# Altium PCB PCB_mic_array.pcbdoc
Units mil, origin at the board's own origin, x right, y up, seen from the top; angles counter-clockwise.
Board outline 10485.75 x 9420.34 mil, 2 copper layers (Top Layer, Bottom Layer); 66 components, 56 nets, 207 pads, 92 vias.
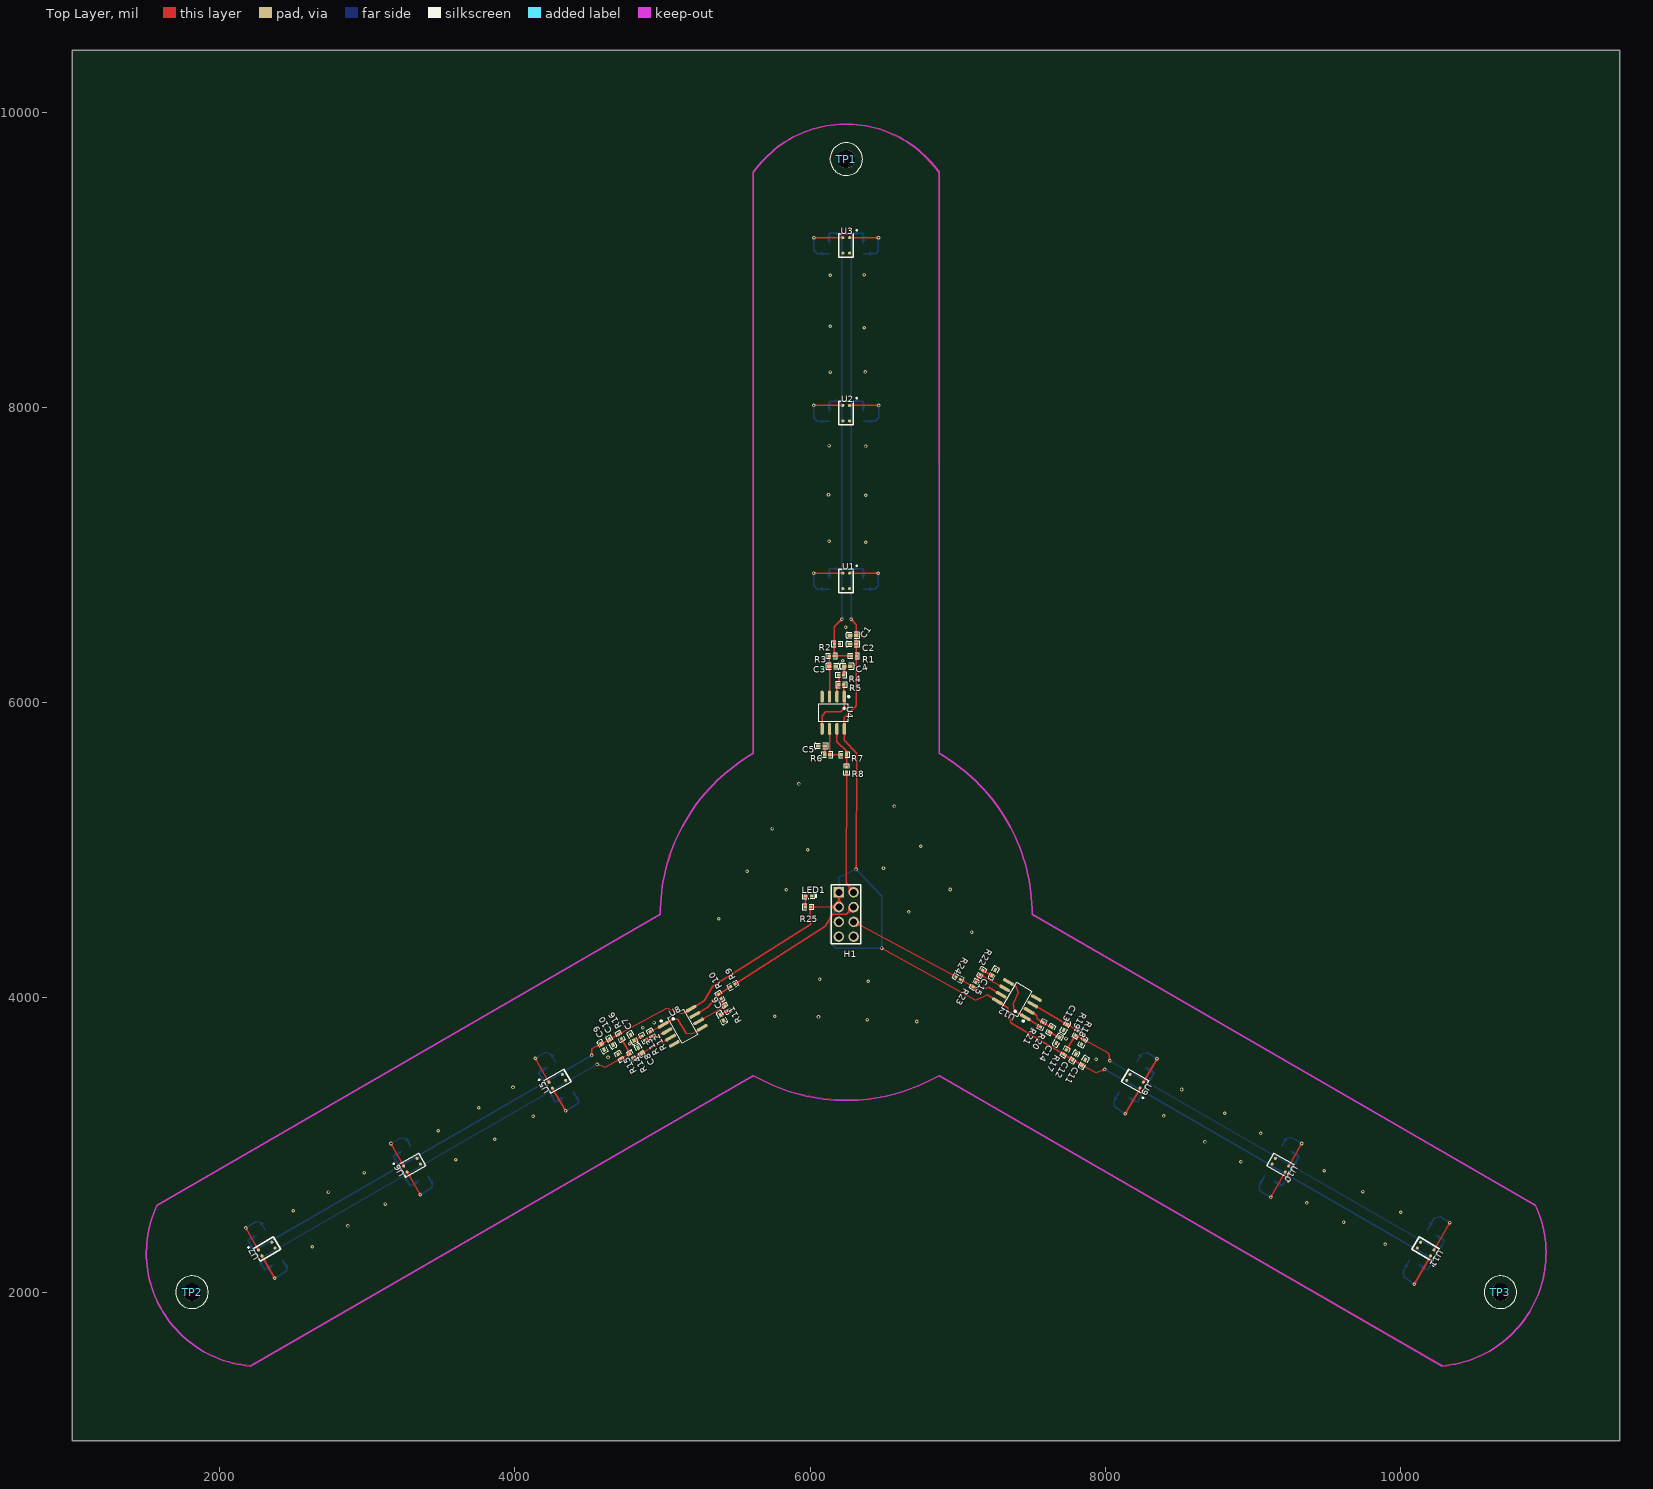
[diagram p0: Top Layer view]
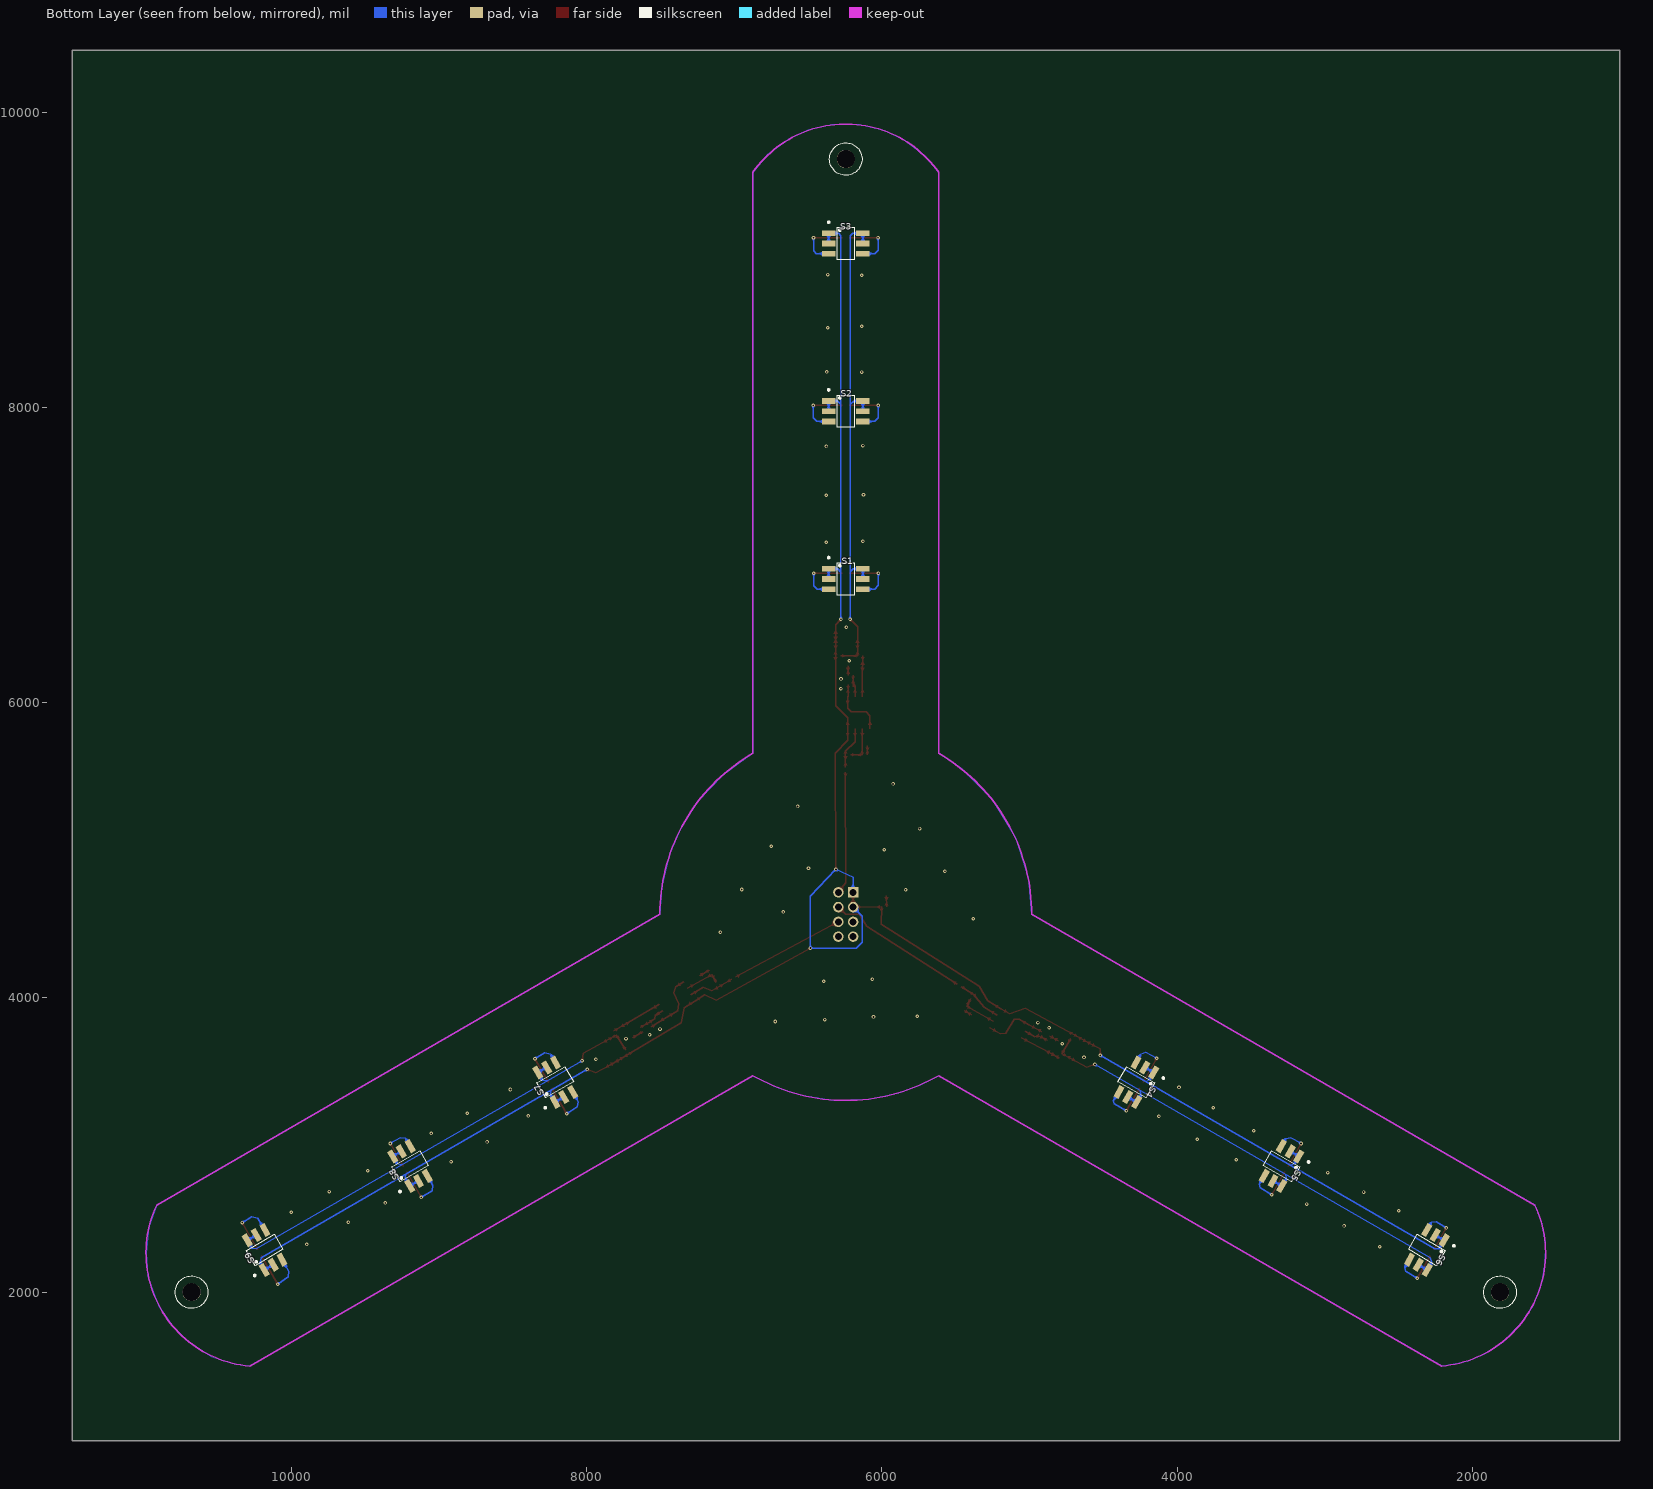
[diagram p1: Bottom Layer view, seen from below]

## Layer stack, top to bottom
Top Layer: signal copper (thickness not stored)
Dielectric: dielectric 12.6, FR-4, Dk 4.8
Bottom Layer: signal copper (thickness not stored)

## Board outline
11485.75,1000 1000,1000 1000,10420.34 11485.75,10420.34

## Components (designator, comment, footprint, x,y, rotation, side; value= is the part's Value field where it differs from the comment)
C1 "0.1u" C0402 6291.29,6456.37 r0 top
C2 "0.1u" C0402 6291.29,6396.37 r0 top
C3 "1u" C0402 6151.29,6246.37 r180 top
C4 "0.1u" C0402 6251.29,6246.37 r0 top
C5 "0.1u" C0402 6076.29,5706.37 r0 top
C6 "0.1u" C0402 5402.35,3864.84 r120 top
C7 "0.1u" C0402 4795.27,3729.01 r120 top
C8 "1u" C0402 4846.06,3643.18 r300 top
C9 "0.1u" C0402 4593.3,3667.59 r120 top
C10 "0.1u" C0402 4652.75,3699.48 r120 top
C11 "0.1u" C0402 7853.14,3562.48 r240 top
C12 "0.1u" C0402 7789.36,3599.09 r240 top
C13 "1u" C0402 7728.73,3800.66 r60 top
C14 "0.1u" C0402 7677.94,3712.08 r240 top
C15 "0.1u" C0402 7242.9,4169.56 r240 top
H1 "A2541WV-2X4P" HDR-TH_8P-P2.54-V-R2-C4-S2.54_A2541WV-2X4P 6244.48,4564.44 r270 top
LED1 "16-219A/T2D-AR2T1QY/3T" LED0402-RD 5989.76,4690.82 r180 top
R1 "1M" R0402 6296.29,6316.37 r0 top
R2 "1M" R0402 6181.29,6396.37 r180 top
R3 "0" R0402 6146.29,6316.37 r0 top
R4 "10k" R0402 6211.29,6186.37 r0 top
R5 "120k" R0402 6211.29,6121.37 r180 top
R6 "10k" R0402 6116.29,5646.37 r0 top
R7 "120k" R0402 6229.36,5646.76 r180 top
R8 "100k" R0402 6246.29,5546.37 r90 top
R9 "100k" R0402 5475.58,4084.13 r210 top
R10 "120k" R0402 5388.18,4009.33 r300 top
R11 "10k" R0402 5433.85,3928.22 r120 top
R12 "120k" R0402 4924.01,3755.78 r300 top
R13 "10k" R0402 4870.07,3725.86 r120 top
R14 "0" R0402 4788.18,3606.57 r120 top
R15 "1M" R0402 4708.26,3602.63 r300 top
R16 "1M" R0402 4712.59,3738.46 r120 top
R17 "1M" R0402 7727.15,3631.77 r240 top
R18 "1M" R0402 7847.23,3700.27 r60 top
R19 "0" R0402 7806.68,3761.3 r240 top
R20 "10k" R0402 7628.73,3784.92 r240 top
R21 "120k" R0402 7570.07,3817.59 r60 top
R22 "10k" R0402 7160.23,4172.32 r240 top
R23 "120k" R0402 7112.59,4089.25 r60 top
R24 "100k" R0402 7003.53,4132.55 r330 top
R25 "1k" R0402 5984.64,4615.23 r180 top
S1 "CAS-D20TB" CAS-D20TB 6244.48,6837.47 r90 bottom
S2 "CAS-D20TB" CAS-D20TB 6244.48,7974 r90 bottom
S3 "CAS-D20TB" CAS-D20TB 6244.48,9110.5 r90 bottom
S4 "CAS-D20TB" CAS-D20TB 4275.98,3427.91 r210 bottom
S5 "CAS-D20TB" CAS-D20TB 3291.73,2859.68 r210 bottom
S6 "CAS-D20TB" CAS-D20TB 2307.48,2291.42 r210 bottom
S7 "CAS-D20TB" CAS-D20TB 8212.98,3427.91 r330 bottom
S8 "CAS-D20TB" CAS-D20TB 9197.23,2859.68 r330 bottom
S9 "CAS-D20TB" CAS-D20TB 10181.48,2291.42 r330 bottom
TP1 "M3X6+4 铜柱" M3铜柱 6244.48,9682.54 r0 top
TP2 "M3X6+4 铜柱" M3铜柱 1812.09,2005.39 r0 top
TP3 "M3X6+4 铜柱" M3铜柱 10676.87,2005.39 r0 top
U1 "spq1410hr5h-b" SPQ1410HR5H-B 6244.48,6824.48 r0 top
U2 "spq1410hr5h-b" SPQ1410HR5H-B 6244.48,7961.05 r0 top
U3 "spq1410hr5h-b" SPQ1410HR5H-B 6244.48,9097.54 r0 top
U4 "MCP6022-I/SN" SOIC-8_L4.9-W3.9-P1.27-LS6.0-BL 6156.28,5931.34 r180 top
U5 "spq1410hr5h-b" SPQ1410HR5H-B 4287.24,3434.41 r120 top
U6 "spq1410hr5h-b" SPQ1410HR5H-B 3302.99,2866.18 r120 top
U7 "spq1410hr5h-b" SPQ1410HR5H-B 2318.74,2297.91 r120 top
U8 "MCP6022-I/SN" SOIC-8_L4.9-W3.9-P1.27-LS6.0-BL 5136.98,3806.94 r300 top
U9 "spq1410hr5h-b" SPQ1410HR5H-B 8201.68,3434.45 r240 top
U10 "spq1410hr5h-b" SPQ1410HR5H-B 9185.97,2866.14 r240 top
U11 "spq1410hr5h-b" SPQ1410HR5H-B 10170.18,2297.95 r240 top
U12 "MCP6022-I/SN" SOIC-8_L4.9-W3.9-P1.27-LS6.0-BL 7400.78,3987.64 r60 top

## Footprints (in the part's own frame and the unit in brackets; to place one, negate y for a bottom-side part, rotate by r counter-clockwise, add the part's x,y. Pads: shape width x height; smd on the part's side, far side on the other; paste and mask are expansions set on the pad)
C0402 [mm]
  rect 0.79x0.54 smd: 1(-0.545,0) 2(0.545,0)
  silkscreen extent -1.17,-0.5 1.17,0.5
CAS-D20TB [mm]
  rect 0.98x2.28 smd: 1(1.75,2.94) 2(0,2.94) 3(-1.75,2.94) 4(1.75,-2.94) 5(0,-2.94) 6(-1.75,-2.94)
  silkscreen extent -2.78,-1.5 3.84,3.1
HDR-TH_8P-P2.54-V-R2-C4-S2.54_A2541WV-2X4P [mm]
  rect 1.8x1.8 hole 1.2: 1(-3.81,-1.27)
  round 1.8 hole 1.2: 2(-3.81,1.27) 3(-1.27,-1.27) 4(-1.27,1.27) 5(1.27,-1.27) 6(1.27,1.27) 7(3.81,-1.27) 8(3.81,1.27)
  silkscreen extent -5.08,-2.54 5.08,2.54
LED0402-RD [mm]
  rect 0.636x0.54 smd: 1(-0.538,0) 2(0.538,0)
  silkscreen extent -1.39,-0.54 1.09,0.54
M3铜柱 [mm]
  round 3.1 hole 3.1 unplated: ""(0,0)
  Top Layer pour cut-out: -0.009,-2.933 1.452,-2.541 2.522,-1.471 2.913,-0.009 2.521,1.452 1.451,2.521 -0.01,2.913 -1.471,2.521 -2.541,1.452 -2.933,-0.009 -2.542,-1.471 -1.472,-2.541 -0.011,-2.933 -0.011,-2.933 -0.011,-2.933 -0.009,-2.933
  Bottom Layer pour cut-out: -0.009,-2.913 1.452,-2.521 2.522,-1.451 2.913,0.011 2.521,1.472 1.451,2.541 -0.01,2.933 -1.471,2.541 -2.541,1.472 -2.933,0.011 -2.542,-1.451 -1.472,-2.521 -0.011,-2.913 -0.011,-2.913 -0.011,-2.913 -0.009,-2.913
  silkscreen extent -2.8,-2.8 2.8,2.8
R0402 [mm]
  rect 0.566x0.54 smd: 1(-0.433,0) 2(0.433,0)
  silkscreen extent -0.94,-0.5 0.94,0.5
SOIC-8_L4.9-W3.9-P1.27-LS6.0-BL [mm]
  oval 0.588x2.045 smd: 1(-1.905,-2.773) 2(-0.635,-2.773) 3(0.635,-2.773) 4(1.905,-2.773) 5(1.905,2.773) 6(0.635,2.773) 7(-0.635,2.773) 8(-1.905,2.773)
  silkscreen extent -2.8,-2.92 2.53,1.52
SPQ1410HR5H-B [mm]
  round 0.525 smd: 1(0.575,1.33) 2(0.575,-1.33) 3(-0.575,-1.33) 4(-0.575,1.33)
  silkscreen extent -1.25,-2.01 1.9,2.7

## Via types
v1: diameter 24, hole 12, Top Layer to Bottom Layer, tented both sides, 92 vias

## Nets (pads, with @x,y where several pads share a name; then routed paths per layer and width w, separated by ;. In a path a pad name is that pad's centre, name@x,y a point inside that pad or via, vN(x,y) a via of type N, cw(c..) or ccw(c..) an arc to the next point about the centre after c; other vN are vias at no path point)
C6_2: C6.2 R11.1 | length 59
  Top Layer w10: C6.2 R11.1@5442.38,3913.44
C7_1: C7.1 R13.2 | length 63.3
  Top Layer w10: C7.1 R13.2
C8_2: C8.2 R14.1 U8.3 | length 293.3
  Top Layer w10: R14.1 C8.2 U8.3@5054.98,3730.74
GND: C1.1 C2.1 C3.1 C4.2 C5.1 C6.1 C7.2 C8.1 C9.1 C10.1 C11.1 C12.1 C13.1 C14.2 C15.1 H1.5 H1.7 H1.8 LED1.1 R2.1 R15.1 R18.1 U1.2 U1.3 U2.2 U2.3 U3.2 U3.3 U4.4 U5.2 U5.3 U6.2 U6.3 U7.2 U7.3 U8.4 U9.2 U9.3 U10.2 U10.3 U11.2 U11.3 U12.4
  other v1: 2626.77,2313.26 9896.05,2329.01 2868.11,2454.6 9614.16,2479.01 10001.17,2547.12 2497.24,2557.75 3121.65,2602.24 9364.55,2610.51 2735.83,2683.34 9743.29,2686.88 2978.74,2815.62 9482.66,2828.62 8918.88,2888.85 3599.6,2902.63 8674.4,3023.1 3862.6,3042 9053.53,3080.98 3480.71,3099.88 4122.83,3197.51 8395.26,3199.48 8808.25,3217.99 3754.72,3254.99 8516.52,3378.62 3986.61,3392.39 7937.39,3582.95 4630.31,3595.94 4778.34,3688.06 7733.45,3723.5 7573.61,3749.87 7503.14,3787.67 4867.32,3797.51 4942.91,3831.76 6722.04,3839.24 6386.21,3852.24 6056.69,3870.74 5760.23,3874.28 6393.69,4111.68 6063.77,4126.25 7093.69,4444.75 5380.31,4534.91 6667.71,4581.76 5838.97,4731.76 6948.81,4733.73 5572.43,4856.56 6496.84,4878.22 5983.06,5002.63 6749.2,5026.25 5744.48,5146.72 6571.25,5296.72 5923.62,5449.08 6277.16,6093.57 6276.76,6160.11 6220.86,6284.12 6239.76,6510.5 6376.37,7086.09 6127.95,7093.57 6376.37,7404.59 6124.4,7408.53 6375.58,7735.3 6127.95,7741.6 6136.61,8239.63 6374.01,8240.02 6366.53,8539.63 6136.61,8549.86 6136.61,8894.75 6366.53,8899.86
OUT1: H1.2 R8.1 | length 832.2
  Top Layer w10: R8.1 6244.48,4778.24 H1.2
OUT2: H1.4 R9.1 | length 981.9
  Top Layer w10: R9.1@5490.38,4092.64 6100.78,4485.74 6154.68,4564.44 6244.48,4564.44 H1.4
OUT3: H1.6 R24.1 | length 788.3
  Top Layer w10: H1.6 R24.1@6988.78,4141.04
R4_2: C4.1 R4.2 | length 60.6
  Top Layer w10: R4.2@6228.38,6186.34 6228.38,6244.84 C4.1@6229.78,6246.34
R6_1: C5.2 R6.1 | length 60.6
  Top Layer w10: C5.2@6097.78,5706.34 6097.78,5647.84 R6.1@6099.28,5646.34
R9_2: R9.2 R10.1 U8.7 | length 313.2
  Top Layer w10: U8.7@5218.98,3883.14 5307.48,3935.34 5379.68,4024.04 R9.2
R10_2: R10.2 R11.2 U8.6 | length 267.7
  Top Layer w10: U8.6@5243.98,3839.84 5425.38,3942.94 R10.2@5396.68,3994.54
R12_1: R12.1 U8.1 U8.5 | length 437.6
  Top Layer w10: R12.1 5004.98,3817.34 5069.68,3854.64 5102.78,3853.84 5160.58,3760.54 5197.68,3756.54 U8.5@5268.98,3796.54
R12_2: R12.2 R13.1 U8.2 | length 168.6
  Top Layer w10: R13.1 R12.2 4963.38,3737.64 U8.2@5029.98,3774.04
R20_2: C14.1 R20.2 | length 79.1
  Top Layer w10: R20.2@7620.18,3770.14 C14.1@7688.68,3730.64
R22_1: C15.2 R22.1 | length 73
  Top Layer w10: R22.1@7168.78,4187.04 C15.2@7232.18,4150.94
R25_2: LED1.2 R25.2 | length 75.6
  Top Layer w10: R25.2 LED1.2
S$35682: 
S$35696: 
S$35736: 
S$35740: 
S$35744: 
S$35748: 
S$35752: 
S$35756: 
SIGN1: R1.1 R2.2 R3.2 S1.4 S1.5 S2.4 S2.5 S3.4 S3.5 | length 3471.1
  Top Layer w10: v1@6215.38,6564.04 6164.28,6512.94 6164.28,6396.34 6163.38,6316.34 R1.1@6279.28,6316.34
  Bottom Layer w10: S1.5@6128.78,6837.44 6128.78,6906.34 6193.58,6906.34 6214.98,6884.94 ; S2.5@6128.78,7974.04 6128.78,8042.94 6191.78,8042.94 6213.78,8020.94 ; S3.5@6128.78,9110.54 6128.78,9179.44 6197.58,9179.44 6212.58,9164.44 6212.58,9086.44 v1@6215.38,6564.04
  other v1: 6215.35,6564.04
SIGN1_RECV1: S1.6 U1.4 | length 397.9
  Top Layer w10: v1(6022.83,6876.64) U1.4@6221.88,6876.84
  Bottom Layer w10: v1(6022.83,6876.64) 6022.78,6794.74 6048.98,6768.54 S1.6@6128.78,6768.54
SIGN1_RECV2: S2.6 U2.4 | length 396.1
  Top Layer w10: v1@6023.98,8013.24 U2.4@6221.88,8013.44
  Bottom Layer w10: v1@6023.98,8013.24 6023.98,7930.14 6049.08,7905.14 S2.6@6128.78,7905.14
  other v1: 6024.01,8013.25
SIGN1_RECV3: S3.6 U3.4 | length 393.9
  Top Layer w10: v1@6025.58,9149.44 U3.4@6221.88,9149.94
  Bottom Layer w10: v1@6025.58,9149.44 6025.58,9064.44 6048.38,9041.64 S3.6@6128.78,9041.64
  other v1: 6025.58,9149.47
SIGN1_VCC1: S1.3 U1.1 | length 389.4
  Top Layer w10: U1.1 v1(6461.41,6876.64)
  Bottom Layer w10: S1.3@6360.18,6768.54 6437.18,6768.54 6461.38,6792.74 v1(6461.41,6876.64)
SIGN1_VCC2: S2.3 U2.1 | length 395.9
  Top Layer w10: U2.1 v1@6464.98,8013.24
  Bottom Layer w10: S2.3 6439.48,7905.14 6464.98,7930.54 v1@6464.98,8013.24
  other v1: 6464.95,8013.25
SIGN1_VCC3: S3.3 U3.1 | length 395.8
  Top Layer w10: U3.1 v1@6462.98,9149.84
  Bottom Layer w10: S3.3 6444.08,9041.64 6462.98,9060.54 v1@6462.98,9149.84
  other v1: 6462.98,9149.86
SIGN2: R14.2 R15.2 R16.1 S4.4 S4.5 S5.4 S5.5 S6.4 S6.5 | length 3463.2
  Top Layer w10: v1(4556.3,3548.3) 4611.38,3529.84 4716.78,3587.84 R14.2 R16.1
  Bottom Layer w10: S6.5@2365.38,2191.14 S6.4 2275.18,2209.74 2285.48,2238.84 v1(4556.3,3548.3) ; 3264.08,2803.14 3258.68,2776.64 3289.98,2724.94 S5.5 ; 4250.78,3372.24 4244.48,3341.64 S4.4 S4.5@4333.88,3327.64
SIGN2_RECV1: S4.6 U5.4 | length 366.5
  Top Layer w10: U5.4 v1(4342.91,3234.13)
  Bottom Layer w10: v1(4342.91,3234.13) 4425.58,3281.74 4431.88,3301.04 S4.6
SIGN2_RECV2: S5.6 U6.4 | length 362.9
  Top Layer w10: U6.4 v1(3358.66,2665.23)
  Bottom Layer w10: v1(3358.66,2665.23) 3436.98,2712.04 3444.08,2735.34 S5.6@3409.28,2793.84
SIGN2_RECV3: S6.6 U7.4 | length 354.5
  Top Layer w10: U7.4 v1(2372.44,2100.27)
  Bottom Layer w10: v1@2372.48,2100.24 2450.38,2148.34 2457.88,2170.34 S6.6
SIGN2_VCC1: S4.3 U5.1 | length 372
  Top Layer w10: v1(4137.79,3589.64) U5.1
  Bottom Layer w10: v1(4137.79,3589.64) 4212.98,3631.74 4246.48,3616.84 S4.3
SIGN2_VCC2: S5.3 U6.1 | length 351.8
  Top Layer w10: v1@3159.48,3012.84 U6.1
  Bottom Layer w10: v1@3159.48,3012.84 3228.38,3053.04 3264.98,3045.54 S5.3@3293.48,2994.34
  other v1: 3159.45,3012.87
SIGN2_VCC3: S6.3 U7.1 | length 348.1
  Top Layer w10: v1(2175.59,2440.82) U7.1
  Bottom Layer w10: v1(2175.59,2440.82) 2244.08,2482.14 2278.38,2478.64 S6.3
SIGN3: R17.1 R18.2 R19.2 S7.4 S7.5 S8.4 S8.5 S9.4 S9.5 | length 3461.3
  Top Layer w10: R17.1 R19.2 R18.2 8023.98,3625.04 v1(8031.09,3573.5)
  Bottom Layer w10: v1(8031.09,3573.5) 10239.98,2299.14 10268.08,2303.44 S9.4 S9.5@10239.38,2391.64 ; 8266.48,3437.44 8299.58,3440.44 S7.4 S7.5@8270.88,3528.14 ; 9251.08,2869.64 9283.88,2874.24 9314.78,2925.44 S8.5
SIGN3_RECV1: S7.6 U9.4 | length 367.3
  Top Layer w10: U9.4 v1(8349.99,3587.28)
  Bottom Layer w10: S7.6 8244.48,3619.14 8285.38,3627.44 v1@8349.98,3587.24
SIGN3_RECV2: S8.6 U10.4 | length 354.1
  Top Layer w10: U10.4 v1(9331.09,3012.87)
  Bottom Layer w10: S8.6@9195.48,2994.34 9226.78,3049.04 9264.58,3050.24 v1@9331.08,3012.84
SIGN3_RECV3: S9.6 U11.4 | length 425.8
  Top Layer w10: U11.4 v1(10333.45,2477.04)
  Bottom Layer w10: S9.6 10227.58,2506.54 10268.48,2516.44 v1@10333.48,2477.04
SIGN3_VCC1: S7.3 U9.1 | length 399.7
  Top Layer w10: v1(8135.42,3214.84) U9.1
  Bottom Layer w10: S7.3@8095.48,3362.14 8055.88,3295.14 8062.58,3260.54 v1(8135.42,3214.84)
SIGN3_VCC2: S8.3 U10.1 | length 396.6
  Top Layer w10: v1(9120.46,2647.51) U10.1
  Bottom Layer w10: S8.3@9079.68,2793.84 9042.48,2730.94 9046.88,2694.34 v1(9120.46,2647.51)
SIGN3_VCC3: S9.3 U11.1 | length 440.3
  Top Layer w10: v1(10093.29,2059.33) U11.1
  Bottom Layer w10: S9.3@10063.98,2225.64 10017.28,2146.74 10020.08,2109.34 v1(10093.29,2059.33)
U4_1: R5.1 U4.1 U4.5 | length 421
  Top Layer w10: U4.5 6081.28,5911.34 6106.28,5936.34 6206.28,5936.34 6231.28,5961.34 U4.1 6228.38,6043.44 R5.1@6228.38,6121.34
U4_2: R4.1 R5.2 U4.2 | length 151.2
  Top Layer w10: U4.2 6181.28,6108.44 6194.28,6121.34 R4.1@6194.28,6186.34
U4_3: C3.2 R3.1 U4.3 | length 276.5
  Top Layer w10: R3.1@6129.28,6316.34 6129.78,6246.34 6131.28,6244.94 U4.3
U4_6: R6.2 R7.2 U4.6 | length 255.7
  Top Layer w10: U4.6 6133.38,5820.14 6133.38,5646.34 R7.2@6212.28,5646.74
U4_7: R7.1 R8.2 U4.7 | length 285.8
  Top Layer w10: U4.7 6181.28,5736.14 6246.38,5671.04 6246.38,5646.74 R8.2
U12_1: R21.1 U12.1 U12.5 | length 443.7
  Top Layer w10: U12.5@7343.78,4107.14 7396.48,4075.04 7409.48,4033.34 7375.18,3960.54 7383.88,3912.04 U12.1 R21.1@7561.58,3802.84
U12_2: R20.1 R21.2 U12.2 | length 197.9
  Top Layer w10: U12.2 7534.98,3880.14 7538.98,3857.74 7578.58,3832.34 R20.1@7637.28,3799.64
U12_3: C13.2 R19.1 U12.3 | length 355.6
  Top Layer w10: U12.3 C13.2 R19.1@7815.18,3776.04
U12_6: R22.2 R23.2 U12.6 | length 253.2
  Top Layer w10: R23.2 7151.68,4157.54 U12.6@7318.78,4063.84
U12_7: R23.1 R24.2 U12.7 | length 314.5
  Top Layer w10: R24.2 7104.08,4074.44 7152.38,4046.34 7209.48,4069.94 U12.7@7293.78,4020.54
VCC: C1.2 C2.2 C9.2 C10.2 C11.2 C12.2 H1.1 H1.3 R1.2 R16.2 R17.2 R25.1 S1.1 S1.2 S2.1 S2.2 S3.1 S3.2 S4.1 S4.2 S5.1 S5.2 S6.1 S6.2 S7.1 S7.2 S8.1 S8.2 S9.1 S9.2 U4.8 U8.8 U12.8 | length 16466.5
  Top Layer w10: v1(4519.68,3609.72) 4520.48,3653.44 4582.58,3686.14 4641.98,3718.04 R16.2 5026.78,3927.44 5134.28,3893.54 5193.98,3926.44 5283.08,3979.04 5340.58,4079.04 6002.78,4498.34 R25.1 H1.3 H1.1 ; v1(6277.16,6564.44) 6312.78,6528.84 6312.78,6456.34 6312.78,6396.34 6313.38,6316.34 6313.38,5978.44 6231.28,5896.34 U4.8 6231.88,5743.54 6314.98,5656.14 v1@6311.38,4869.94 ; v1@6483.88,4336.44 7122.78,3984.54 7200.38,4019.54 U12.8@7268.78,3977.34 ; U12.8@7268.78,3977.24 7338.58,3934.14 7360.18,3829.84 7718.68,3617.04 7778.68,3580.54 C11.2 7938.18,3492.04 v1(7996.48,3514.44)
  Bottom Layer w10: S6.2@2249.58,2391.64 2189.98,2357.24 2224.38,2298.74 2253.58,2299.84 v1(4519.68,3609.72) ; 3232.18,2865.54 3206.28,2873.94 3174.18,2925.44 S5.2 ; 4212.08,3431.94 4187.38,3443.94 4158.48,3493.74 S4.2@4218.08,3528.14 ; H1.3 6133.48,4553.44 6133.48,4376.24 6173.58,4336.14 6483.88,4336.44 6483.88,4689.64 6311.38,4869.94 6194.88,4817.54 H1.1 ; v1(6277.16,6564.44) 6277.18,9164.04 6292.48,9179.44 S3.1 S3.2 ; 6277.18,6884.44 6299.08,6906.34 6360.18,6906.34 S1.2@6360.18,6837.44 ; 6277.18,8021.64 6298.48,8042.94 S2.1 S2.2 ; v1(7996.48,3514.44) 10205.88,2237.64 10212.58,2208.14 S9.1 S9.2@10123.58,2191.14 ; S7.2@8155.08,3327.64 S7.1 8246.08,3348.74 8241.48,3372.44 ; S8.2 9198.98,2724.94 9230.28,2779.04 9224.58,2804.44
  other v1: 6483.85,4336.49 6311.41,4869.95
pads on no net: TP1. TP2. TP3.

## Polygon pours and split planes (outlines as drawn)
GND on Bottom Layer (solid): 10282.66,1505.39 6875.97,3471.93 6711.41,3393.18 6551.17,3342.4 6327.16,3305.39 6095.27,3312.48 5896.45,3352.24 5737.39,3412.48 5613.77,3472.32 2204.33,1505.79 2033.86,1538.86 1915.75,1587.68 1794.88,1665.63 1666.93,1794.76 1584.65,1918.78 1529.92,2062.87 1503.94,2205.79 1501.97,2328.62 1526.77,2467.99 1574.41,2594.76 4983.46,4564.05 5006.29,4810.51 5088.97,5076.65 5251.96,5345.15 5463.38,5554.2 5613.77,5656.96 5614.16,9592.78 5705.5,9702.62 5839.76,9805.38 5983.85,9875.85 6151.96,9915.22 6338.18,9915.22 6501.17,9876.64 6631.09,9817.58 6774.79,9710.1 6873.61,9591.2 6874.4,5656.57 7079.52,5508.93 7248.41,5331.37 7359.44,5154.99 7436.6,4980.19 7489.75,4753.81 7505.11,4564.44 10913.37,2595.16 10968.09,2443.97 10985.41,2269.17 10972.03,2110.51 10902.74,1917.2 10805.49,1773.11 10705.49,1675.87 10588.17,1597.13 10538.57,1569.17 10375.97,1517.2 10282.66,1505.39
GND on Top Layer (solid): 5613.38,9590.42 5690.94,9686.09 5784.64,9766.01 5888.18,9832.54 6009.05,9882.54 6123.22,9911.68 6257.47,9920.34 6396.05,9903.8 6493.3,9878.21 6635.42,9814.04 6747.63,9732.54 6872.43,9593.96 6874.01,5657.35 7043.3,5540.43 7187,5401.45 7321.25,5221.92 7398.41,5070.74 7454.32,4922.71 7488.57,4774.68 7504.32,4563.26 10912.97,2596.73 10958.25,2475.86 10985.02,2336.89 10985.02,2224.68 10969.27,2102.64 10929.11,1979.8 10870.06,1862.87 10788.96,1756.58 10692.11,1665.63 10603.92,1605.79 10492.9,1553.82 10406.28,1526.65 10285.02,1505.79 6875.58,3472.32 6746.05,3408.15 6576.37,3347.91 6457.47,3322.71 6356.29,3308.15 6203.53,3305.78 6051.17,3321.14 5856.69,3364.05 5742.12,3408.15 5612.98,3472.32 2205.12,1505.39 2037.01,1536.5 1888.98,1602.24 1766.54,1690.04 1661.42,1799.88 1577.17,1934.13 1523.62,2086.49 1500,2262.87 1520.87,2445.55 1572.84,2595.55 4983.85,4565.23 4997.24,4757.36 5043.3,4957.36 5123.22,5139.24 5229.13,5316.41 5377.16,5482.16 5525.98,5602.24 5616.13,5659.32 5613.38,9590.42 5614.56,9593.17

## Keep-outs
Keep-Out Layer:
  lines w10 net S$35682: 4984.64,4564.44 cw(c6244.48,4564.44) 5614.56,5655.5
  lines w10 net S$35696: 6874.4,5655.5 cw(c6244.48,4564.44) 7504.32,4564.44
  lines w10 net S$35736: 5614.56,3473.39 ccw(c6244.48,4564.44) 6874.4,3473.39
  lines w10 net S$35740: 1575.08,2595.94 ccw(c2272.25,2271.2) 2204.98,1505.04
  lines w10 net S$35748: 5614.58,9592.34 cw(c6244.5,9149.44) 6874.4,9592.39
  lines w10 net S$35756: 10283.96,1505 ccw(c10216.52,2271.27) 10913.88,2595.94

## Other copper
Top Layer:
  region net U12_1: 7375.05,4102.43 7362.12,4083.23 7378.23,4080.3 7383.82,4088.61
  region net U12_6: 7299.32,4088.45 7288.5,4067.98 7278.31,4080.8 7282.99,4089.65
  region net U12_7: 7274.89,4044.82 7262.94,4024.99 7253.48,4038.36 7258.64,4046.93
  region net VCC: 7300.21,3972.41 7286.96,3953.43 7303.02,3950.23 7308.75,3958.44
  region net VCC: 7250.58,4001.06 7237.24,3982.14 7228.77,3996.15 7234.54,4004.34
  region net U12_3: 7538.6,3950.31 7526.7,3930.45 7542.95,3928.39 7548.09,3936.96
  region net U12_2: 7513.44,3907.1 7501.86,3887.05 7527.71,3878.67 7532.71,3887.33
  region net U12_1: 7489.5,3863.1 7475.8,3844.44 7491.77,3840.85 7497.71,3848.93
  region net U12_1: 7439.12,3892.26 7426.82,3872.65 7417.61,3886.19 7422.93,3894.66
  region net R12_1: 5249.6,3772 5238.75,3792.45 5228.58,3779.61 5233.26,3770.77
  region net R10_2: 5274.43,3844.07 5263.26,3864.34 5279.57,3865.82 5284.4,3857.06
  region net R9_2: 5249.9,3887.64 5237.8,3907.38 5254.02,3909.62 5259.25,3901.09
  region net VCC: 5174.38,3901.79 5163.97,3922.47 5153.52,3909.86 5158.02,3900.92
  region net VCC: 5224.91,3930.95 5212.79,3950.67 5229.01,3952.93 5234.24,3944.41
  region net C8_2: 5034.93,3705.85 5025.29,3726.9 5014.39,3714.68 5018.56,3705.57
  region net R12_2: 5010.2,3749.29 5000.02,3770.08 4989.44,3757.58 4993.84,3748.59
  region net R12_1: 4984.64,3792.33 4975.59,3813.64 4964.34,3801.74 4968.27,3792.5
  region net R12_1: 5035.56,3821.63 5024.02,3841.7 5040.3,3843.48 5045.28,3834.81
  region net U4_1: 6092.85,5850.87 6069.7,5850.87 6076.28,5865.87 6086.28,5865.87
  region net U4_6: 6142.74,5795.13 6119.82,5791.89 6128.38,5777.95 6138.38,5779.37
  region net U4_7: 6192.85,5793.51 6169.7,5793.51 6176.28,5778.51 6186.28,5778.51
  region net VCC: 6242.85,5850.87 6219.7,5850.87 6226.28,5865.87 6236.28,5865.87
  region net VCC: 6242.85,5793.77 6219.71,5793.26 6226.61,5778.41 6236.61,5778.63
  region net U4_3: 6142.85,6069.17 6119.7,6069.17 6126.28,6084.17 6136.28,6084.17
  region net U4_2: 6192.85,6069.17 6169.7,6069.17 6176.28,6084.17 6186.28,6084.17
  region net U4_1: 6242.63,6071.41 6219.92,6066.94 6223.38,6082.91 6233.38,6084.88
  region net U4_1: 6242.85,6011.81 6219.7,6011.81 6226.28,5996.81 6236.28,5996.81
  region net R25_2: 5980.94,4680.19 5956.03,4680.19 5963.24,4665.19 5973.24,4665.19
  region net VCC: 6012.81,4604.6 6012.81,4625.86 6027.81,4620.14 6027.81,4610.14
  region net VCC: 5990.54,4604.6 6012.81,4604.6 6006.92,4589.6 5996.92,4589.6
  region net R25_2: 5956.46,4625.86 5978.73,4625.86 5972.92,4640.86 5962.92,4640.86
  region net OUT3: 6984.45,4155.85 6973.82,4137.44 6963.23,4149.1 6968.24,4157.77
  region net U12_7: 7033.25,4127.67 7022.62,4109.26 7038.42,4106.62 7043.42,4115.29
  region net U12_7: 7107.71,4059.53 7118.84,4078.82 7128.7,4065.9 7123.7,4057.24
  region net U12_7: 7100.43,4089.45 7089.29,4070.16 7079.36,4082.96 7084.36,4091.62
  region net U12_6: 7117.47,4118.96 7135.88,4108.33 7138.38,4124.21 7129.72,4129.21
  region net R22_1: 7172.38,4172.12 7183.52,4191.4 7193.51,4178.71 7188.51,4170.05
  region net U12_6: 7166.48,4161.89 7155.34,4142.6 7171.55,4140.67 7176.55,4149.33
  region net U12_6: 7155.34,4142.6 7136.93,4153.23 7134.39,4137.38 7143.05,4132.38
  region net U12_1: 7557.91,3817.8 7546.77,3798.51 7537.35,3812.18 7542.35,3820.85
  region net U12_2: 7563.81,3828.02 7574.95,3847.31 7559.49,3850.53 7554.48,3841.86
  region net U12_2: 7593.36,3836.68 7582.23,3817.39 7598.48,3815.54 7603.48,3824.2
  region net U12_2: 7633.61,3814.63 7622.48,3795.35 7612.35,3807.81 7617.35,3816.47
  region net R20_2: 7634.98,3774.49 7623.84,3755.2 7639.9,3753 7644.9,3761.66
  region net U12_3: 7811.56,3791.01 7800.43,3771.73 7790.43,3784.41 7795.43,3793.07
  region net SIGN3: 7812.93,3750.86 7801.8,3731.58 7818.16,3729.92 7823.16,3738.58
  region net SIGN3: 7801.8,3731.58 7783.39,3742.21 7779.98,3726.86 7788.65,3721.85
  region net SIGN3: 7870.52,3719.36 7859.39,3700.07 7875.87,3698.62 7880.88,3707.29
  region net SIGN3: 7840.98,3710.7 7852.12,3729.99 7835.77,3731.68 7830.77,3723.02
  region net SIGN3: 7750.45,3650.85 7732.03,3661.48 7745.2,3671.2 7753.86,3666.2
  region net VCC: 7703.86,3612.68 7714.99,3631.97 7699.12,3634.47 7694.12,3625.81
  region net VCC: 7733.4,3621.34 7722.27,3602.05 7738.06,3599.4 7743.06,3608.06
  region net SIGN2: 4717.47,3708.75 4735.89,3719.38 4738.41,3703.52 4729.75,3698.52
  region net VCC: 4700.43,3738.26 4689.3,3757.55 4679.27,3744.92 4684.27,3736.26
  region net VCC: 4707.71,3768.18 4718.84,3748.89 4729.13,3761.08 4724.12,3769.74
  region net SIGN2: 4713.14,3572.92 4702.01,3592.2 4691.84,3579.82 4696.84,3571.16
  region net SIGN2: 4720.42,3602.83 4731.55,3583.55 4741.93,3595.57 4736.93,3604.24
  region net C8_2: 4811.48,3587.49 4800.34,3606.77 4816.69,3608.46 4821.69,3599.8
  region net SIGN2: 4776.02,3606.37 4764.89,3625.66 4754.52,3613.61 4759.53,3604.95
  region net SIGN2: 4764.89,3625.66 4783.3,3636.29 4771.03,3646.52 4762.37,3641.52
  region net R12_2: 4893.37,3706.78 4882.23,3726.06 4898.49,3727.9 4903.49,3719.24
  region net C7_1: 4857.91,3725.66 4846.78,3744.95 4836.52,3732.72 4841.52,3724.06
  region net R12_1: 4930.26,3766.21 4919.13,3785.5 4935.72,3786.77 4940.72,3778.1
  region net R12_2: 4936.17,3755.98 4939.13,3731.98 4954.04,3733.64 4952.78,3743.84
  region net R12_2: 4928.89,3726.07 4917.76,3745.35 4907.59,3732.96 4912.59,3724.29
  region net C6_2: 5427.6,3917.8 5438.73,3898.51 5422.81,3896.08 5417.81,3904.74
  region net R10_2: 5410.56,3947.31 5428.97,3957.94 5416.98,3968.34 5408.32,3963.34
  region net R10_2: 5421.69,3928.02 5410.56,3947.31 5400.58,3934.6 5405.58,3925.94
  region net R9_2: 5366.25,4026.05 5376.02,4009.13 5365.04,3998.14 5359.69,4007.41
  region net R9_2: 5394.44,4019.76 5383.3,4039.04 5398.82,4042.15 5403.83,4033.48
  region net R10_2: 5411.47,3990.24 5393.06,3979.61 5405.05,3969.21 5413.71,3974.21
  region net OUT2: 5505.3,4089.01 5494.67,4107.42 5509.85,4111.13 5514.85,4102.46
  region net R9_2: 5456.5,4060.84 5445.87,4079.25 5436.23,4065.95 5441.23,4057.28
  region net OUT1: 6235.66,5518.19 6256.92,5518.19 6251.22,5503.19 6241.22,5503.19
  region net U4_7: 6235.66,5574.54 6256.92,5574.54 6251.31,5589.54 6241.31,5589.54
  region net U4_7: 6235.27,5636.13 6257.54,5636.13 6251.35,5621.13 6241.35,5621.13
  region net U4_7: 6257.54,5657.38 6235.27,5657.38 6241.38,5671.04 6251.38,5671.04
  region net U4_6: 6201.19,5636.13 6201.19,5657.38 6186.19,5651.61 6186.19,5641.61
  region net R6_1: 6110.28,5657 6088.11,5657 6092.78,5672 6102.78,5672
  region net U4_6: 6122.2,5657 6144.46,5657 6138.38,5672 6128.38,5672
  region net U4_6: 6144.46,5657 6144.46,5635.74 6159.46,5641.47 6159.46,5651.47
  region net U4_1: 6217.2,6110.74 6239.46,6110.74 6233.38,6095.74 6223.38,6095.74
  region net U4_2: 6202.01,6110.74 6183.11,6127.11 6177.71,6111.95 6185.29,6105.38
  region net U4_2: 6183.11,6132 6205.38,6132 6199.28,6147 6189.28,6147
  region net U4_2: 6183.11,6175.74 6205.38,6175.74 6199.28,6160.74 6189.28,6160.74
  region net R4_2: 6217.2,6197 6239.46,6197 6233.38,6212 6223.38,6212
  region net U4_3: 6118.11,6305.74 6140.38,6305.74 6134.46,6290.74 6124.46,6290.74
  region net SIGN1: 6152.2,6327 6174.46,6327 6168.67,6342 6158.67,6342
  region net SIGN1: 6174.46,6327 6174.46,6305.74 6189.46,6311.34 6189.46,6321.34
  region net SIGN1: 6153.11,6407 6175.38,6407 6169.28,6422 6159.28,6422
  region net SIGN1: 6175.38,6385.74 6153.11,6385.74 6158.99,6370.74 6168.99,6370.74
  region net SIGN1: 6268.11,6327 6268.11,6305.74 6253.11,6311.34 6253.11,6321.34
  region net VCC: 6324.46,6305.74 6302.2,6305.74 6308.38,6290.74 6318.38,6290.74
  region net VCC: 6302.2,6327 6324.46,6327 6318.19,6342 6308.19,6342
  region net VCC: 6206.98,4679.01 6181.98,4679.01 6189.48,4664.01 6199.48,4664.01
  region net R22_1: 7216.67,4145.39 7229.17,4167.04 7212.39,4167.97 7207.39,4159.31
  region net R20_2: 7685.71,3746.79 7673.2,3725.14 7663.96,3739.13 7668.96,3747.79
  region net U12_3: 7724.03,3813.79 7736.54,3835.44 7719.84,3836.52 7714.84,3827.86
  region net U12_3: 7754.94,3824.81 7742.44,3803.16 7759.22,3802.22 7764.22,3810.88
  region net VCC: 7763.32,3575.26 7775.82,3596.91 7759.26,3598.21 7754.25,3589.55
  region net VCC: 7794.13,3586.08 7781.63,3564.43 7798.38,3563.46 7803.38,3572.12
  region net VCC: 7858.02,3549.68 7845.53,3528.03 7862.47,3527.37 7867.47,3536.04
  region net VCC: 7826.96,3538.39 7839.46,3560.04 7822.7,3561.02 7817.7,3552.36
  region net VCC: 4638.9,3702.21 4626.4,3723.86 4616.93,3710.27 4621.93,3701.6
  region net VCC: 4645.02,3734.14 4657.52,3712.48 4666.82,3726.38 4661.82,3735.04
  region net VCC: 4579.43,3670.37 4566.93,3692.02 4557.39,3678.53 4562.4,3669.86
  region net VCC: 4585.71,3702 4598.21,3680.35 4607.68,3693.95 4602.68,3702.61
  region net C8_2: 4859.89,3640.48 4872.39,3618.83 4881.87,3632.41 4876.87,3641.07
  region net C8_2: 4853.68,3608.72 4841.18,3630.37 4831.76,3616.69 4836.76,3608.02
  region net C7_1: 4821.58,3704.7 4809.08,3726.35 4826.02,3727.02 4831.02,3718.35
  region net C6_2: 5394.51,3899.69 5407.01,3878.04 5416.18,3892.16 5411.18,3900.82
  region net R6_1: 6110.28,5695.74 6085.28,5695.74 6092.78,5680.74 6102.78,5680.74
  region net R4_2: 6215.88,6235.74 6240.88,6235.74 6233.38,6220.74 6223.38,6220.74
  region net U4_3: 6117.2,6257 6142.2,6257 6134.6,6272 6124.6,6272
  region net U4_3: 6143.78,6235.74 6118.78,6235.74 6126.28,6220.74 6136.28,6220.74
  region net VCC: 6300.28,6407 6325.28,6407 6317.78,6422 6307.78,6422
  region net VCC: 6325.36,6385.74 6300.36,6385.74 6307.97,6370.74 6317.97,6370.74
  region net VCC: 6300.28,6467 6325.28,6467 6317.78,6482 6307.78,6482
  region net VCC: 6325.28,6445.74 6300.28,6445.74 6307.78,6430.74 6317.78,6430.74
  region net SIGN3_VCC2: 9116.62,2658.88 9132.22,2649.9 9132.94,2659.18 9124.27,2664.17
  region net SIGN3_VCC3: 10089.44,2070.7 10105.05,2061.72 10105.77,2071 10097.1,2075.99
  region net SIGN3_RECV3: 10321.69,2474.64 10337.3,2465.68 10329.65,2460.39 10320.98,2465.37
  region net SIGN3_RECV2: 9319.33,3010.5 9334.92,3001.5 9327.25,2996.22 9318.59,3001.22
  region net SIGN3_VCC1: 8131.59,3226.22 8147.18,3217.22 8147.92,3226.49 8139.26,3231.49
  region net SIGN3_RECV1: 8338.23,3584.89 8353.83,3575.92 8346.18,3570.63 8337.51,3575.61
  region net SIGN3: 8038.92,3582.6 8021.09,3580.13 8023.9,3589 8033.81,3590.37
  region net VCC: 7992.3,3503.2 7985.84,3520 7979.44,3513.25 7983.02,3503.92
  region net SIGN2_VCC1: 4133.93,3578.28 4149.55,3587.23 4150.25,3577.96 4141.58,3572.98
  region net SIGN2_VCC2: 3155.54,3001.53 3171.19,3010.41 3171.86,3001.13 3163.16,2996.2
  region net SIGN2_RECV2: 3346.89,2667.6 3362.48,2676.61 3354.81,2681.88 3346.15,2676.88
  region net SIGN2_VCC3: 2171.78,2429.44 2187.36,2438.46 2188.1,2429.19 2179.44,2424.18
  region net SIGN2_RECV3: 2360.68,2102.65 2376.26,2111.65 2368.6,2116.92 2359.94,2111.92
  region net SIGN2_RECV1: 4331.14,3236.46 4346.69,3245.52 4339.01,3250.77 4330.37,3245.74
  region net SIGN2: 4566.68,3554.33 4560.98,3537.25 4570.21,3538.39 4573.38,3547.88
  region net VCC: 4528.82,3617.49 4510.83,3617.82 4514.98,3626.15 4524.98,3625.97
  region net SIGN1_RECV3: 6033.52,9140.48 6033.51,9158.48 6041.91,9154.48 6041.92,9144.48
  region net SIGN1_VCC3: 6455.05,9140.86 6455.04,9158.86 6446.64,9154.85 6446.65,9144.85
  region net SIGN1_RECV2: 6031.95,8004.26 6031.94,8022.26 6040.34,8018.26 6040.35,8008.26
  region net SIGN1_VCC2: 6457.02,8004.25 6457.01,8022.25 6448.61,8018.26 6448.61,8008.26
  region net SIGN1_RECV1: 6030.77,6867.65 6030.76,6885.65 6039.16,6881.66 6039.17,6871.66
  region net SIGN1_VCC1: 6453.48,6885.65 6453.46,6867.65 6445.07,6871.66 6445.08,6881.66
  region net VCC: 6289.14,6565.2 6276.42,6552.47 6285.19,6549.36 6292.25,6556.44
  region net SIGN1: 6216.12,6552.07 6203.37,6564.78 6200.27,6556.01 6207.35,6548.94
  region net VCC: 6320.43,4877.87 6302.43,4877.91 6306.45,4886.3 6316.45,4886.28
  region net VCC: 6495.15,4340.53 6486.44,4324.78 6495.72,4324.21 6500.56,4332.96
  region net SIGN3_VCC3: 10207.52,2242.38 10194.08,2250.1 10192.86,2242.46 10201.53,2237.48
  region net SIGN3_RECV3: 10236.97,2293.45 10223.53,2301.17 10229.52,2306.07 10238.19,2301.09
  region net SIGN3_VCC2: 9223.31,2810.56 9209.87,2818.29 9208.65,2810.65 9217.31,2805.66
  region net SIGN3_RECV2: 9252.76,2861.61 9239.34,2869.36 9245.34,2874.25 9254,2869.25
  region net SIGN3_VCC1: 8239,3378.87 8225.58,3386.61 8224.34,3378.97 8233.01,3373.97
  region net SIGN3_RECV1: 8268.47,3429.94 8255.03,3437.66 8261.02,3442.56 8269.69,3437.58
  region net SIGN2_VCC3: 2265.36,2301.14 2251.94,2293.38 2250.7,2301.01 2259.36,2306.02
  region net SIGN2_RECV3: 2294.84,2250.08 2281.42,2242.33 2287.42,2237.44 2296.08,2242.44
  region net SIGN2_VCC2: 3249.68,2869.38 3236.21,2861.72 3235.02,2869.37 3243.72,2874.31
  region net SIGN2_RECV2: 3279.1,2818.35 3265.67,2810.6 3271.68,2805.71 3280.33,2810.71
  region net SIGN2_VCC1: 4233.9,3437.62 4220.45,3429.91 4219.24,3437.55 4227.91,3442.53
  region net SIGN2_RECV1: 4263.35,3386.59 4249.93,3378.82 4255.94,3373.94 4264.59,3378.95
  region net SIGN1_VCC3: 6273.97,9142.17 6273.94,9157.67 6281.18,9154.94 6281.2,9144.94
  region net SIGN1_RECV3: 6215.01,9142.15 6215,9157.65 6207.77,9154.91 6207.77,9144.91
  region net SIGN1_VCC2: 6273.96,8005.67 6273.94,8021.17 6281.18,8018.43 6281.19,8008.43
  region net SIGN1_RECV2: 6215.01,8021.17 6214.99,8005.67 6207.76,8008.43 6207.78,8018.43
  region net SIGN1_VCC1: 6273.96,6884.58 6273.95,6869.08 6281.18,6871.83 6281.19,6881.83
  region net SIGN1_RECV1: 6215.01,6869.08 6215,6884.58 6207.77,6881.83 6207.77,6871.83
  region net OUT3: 6327.71,4526.75 6302.53,4479.94 6334.6,4487.19 6339.33,4496
  region net OUT2: 6259.12,4616.66 6296.7,4579.08 6263.9,4576.8 6256.83,4583.87
  region net VCC: 6171.15,4641.11 6170.93,4587.97 6146.22,4609.64 6146.26,4619.64
  region net VCC: 6221.05,4637.88 6167.9,4637.88 6189.48,4662.68 6199.48,4662.68
  region net OUT1: 6300.94,4749.28 6259.11,4716.5 6260.79,4749.33 6268.66,4755.5
Bottom Layer:
  region net SIGN3: 10265.8,2324.57 10287.45,2312.07 10273.48,2302.81 10264.82,2307.81
  region net SIGN3: 10288.57,2377.69 10276.07,2356.03 10266.83,2370.03 10271.83,2378.69
  region net SIGN3: 10249.81,2371.19 10262.31,2392.84 10271.55,2378.85 10266.55,2370.19
  region net SIGN3_RECV3: 10213.46,2458.43 10191.81,2470.93 10205.99,2480.07 10214.65,2475.07
  region net SIGN3_VCC3: 10030.27,2193.23 10051.92,2180.73 10037.79,2171.57 10029.13,2176.58
  region net VCC: 10134.05,2170.68 10146.55,2192.33 10155.79,2178.35 10150.79,2169.69
  region net VCC: 10172.82,2177.2 10160.32,2155.55 10151.07,2169.53 10156.07,2178.19
  region net VCC: 10216.32,2189.47 10194.67,2201.97 10208.24,2210.62 10216.91,2205.64
  region net SIGN3: 9280.77,2893.28 9302.42,2880.78 9288.21,2871.74 9279.6,2876.83
  region net SIGN3: 9304.31,2945.93 9291.81,2924.28 9282.57,2938.28 9287.57,2946.94
  region net SIGN3: 9265.56,2939.45 9278.06,2961.1 9287.29,2947.1 9282.29,2938.44
  region net SIGN3_RECV2: 9228.6,3027.05 9206.95,3039.55 9220.89,3048.82 9229.55,3043.82
  region net SIGN3_VCC2: 9046.03,2761.5 9067.68,2749 9053.55,2739.84 9044.89,2744.84
  region net VCC: 9149.81,2738.96 9162.31,2760.61 9171.54,2746.61 9166.54,2737.94
  region net VCC: 9210.66,2770.1 9232.31,2757.6 9233.33,2774.33 9224.67,2779.33
  region net VCC: 9176.05,2723.78 9188.55,2745.43 9171.81,2746.45 9166.81,2737.79
  region net SIGN3: 8297.14,3461.15 8318.79,3448.65 8304.77,3439.43 8296.11,3444.43
  region net SIGN3: 8320.07,3514.18 8307.57,3492.53 8298.33,3506.53 8303.33,3515.19
  region net SIGN3: 8281.31,3507.69 8293.81,3529.34 8303.06,3515.35 8298.06,3506.69
  region net SIGN3_RECV1: 8244.78,3595.03 8223.13,3607.53 8237.24,3616.71 8245.9,3611.71
  region net SIGN3_VCC1: 8061.79,3329.71 8083.44,3317.21 8069.32,3308.05 8060.66,3313.05
  region net VCC: 8165.55,3307.18 8178.05,3328.83 8187.3,3314.85 8182.3,3306.19
  region net VCC: 8247.64,3326.07 8225.99,3338.57 8239.86,3347.88 8248.52,3342.88
  region net VCC: 8204.32,3313.69 8191.82,3292.04 8182.57,3306.03 8187.57,3314.69
  region net SIGN2: 2294.13,2201.88 2272.48,2189.38 2271.49,2206.13 2280.15,2211.13
  region net SIGN2: 2328.64,2155.55 2316.14,2177.2 2332.89,2178.19 2337.89,2169.53
  region net SIGN2: 2342.41,2192.33 2354.91,2170.68 2338.16,2169.69 2333.16,2178.35
  region net SIGN2_RECV3: 2437.12,2180.78 2458.77,2193.29 2459.95,2176.64 2451.29,2171.64
  region net SIGN2_VCC3: 2297.35,2471.05 2275.7,2458.55 2274.59,2475.23 2283.25,2480.23
  region net VCC: 2226.65,2392.84 2239.15,2371.19 2222.41,2370.19 2217.41,2378.85
  region net VCC: 2212.89,2356.03 2200.39,2377.68 2217.13,2378.69 2222.13,2370.03
  region net VCC: 2201.91,2312.3 2223.56,2324.8 2224.67,2308.12 2216.01,2303.12
  region net SIGN2: 3277.52,2769.65 3255.87,2757.15 3254.6,2773.73 3263.26,2778.73
  region net SIGN2: 3312.91,2723.77 3300.41,2745.43 3317.14,2746.44 3322.14,2737.78
  region net SIGN2: 3326.65,2760.61 3339.15,2738.96 3322.42,2737.94 3317.42,2746.6
  region net SIGN2_RECV2: 3421.38,2749.05 3443.03,2761.55 3444.2,2744.91 3435.54,2739.91
  region net SIGN2_VCC2: 3282.47,3039.82 3260.82,3027.32 3260.65,3043.04 3269.35,3047.98
  region net VCC: 3210.9,2961.1 3223.4,2939.45 3206.66,2938.44 3201.66,2947.1
  region net VCC: 3187.09,2881.1 3208.74,2893.6 3210.19,2877.12 3201.53,2872.11
  region net VCC: 3197.15,2924.28 3184.65,2945.93 3201.39,2946.94 3206.39,2938.28
  region net SIGN2: 4261.53,3337.74 4239.88,3325.24 4240.22,3339.03 4248.81,3344.14
  region net SIGN2: 4297.14,3292.04 4284.64,3313.7 4301.38,3314.69 4306.38,3306.03
  region net SIGN2: 4310.91,3328.83 4323.41,3307.18 4306.66,3306.19 4301.66,3314.85
  region net SIGN2_RECV1: 4406.58,3317.83 4428.23,3330.33 4429.72,3313.87 4421.05,3308.87
  region net SIGN2_VCC1: 4266.18,3607.73 4244.52,3595.23 4243.52,3611.97 4252.18,3616.97
  region net VCC: 4195.14,3529.34 4207.64,3507.69 4190.9,3506.68 4185.9,3515.34
  region net VCC: 4170.19,3448.66 4191.84,3461.16 4191.7,3446.45 4183.05,3441.44
  region net VCC: 4181.39,3492.53 4168.89,3514.18 4185.63,3515.19 4190.63,3506.53
  region net SIGN1: 6173.61,9166.94 6173.61,9191.94 6188.61,9184.44 6188.61,9174.44
  region net SIGN1: 6116.28,9160.11 6141.28,9160.11 6133.78,9145.11 6123.78,9145.11
  region net SIGN1: 6141.28,9129.79 6116.28,9129.79 6123.78,9144.79 6133.78,9144.79
  region net SIGN1_RECV3: 6083.85,9054.14 6083.85,9029.14 6068.85,9036.64 6068.85,9046.64
  region net SIGN1_VCC3: 6405.11,9029.14 6405.11,9054.14 6420.11,9046.64 6420.11,9036.64
  region net VCC: 6372.68,9129.79 6347.68,9129.79 6355.18,9144.79 6365.18,9144.79
  region net VCC: 6315.35,9191.94 6315.35,9166.94 6300.35,9174.44 6300.35,9184.44
  region net VCC: 6347.68,9160.11 6372.68,9160.11 6365.18,9145.11 6355.18,9145.11
  region net SIGN1: 6173.61,8030.44 6173.61,8055.44 6188.61,8047.94 6188.61,8037.94
  region net SIGN1: 6116.28,8023.61 6141.28,8023.61 6133.78,8008.61 6123.78,8008.61
  region net SIGN1: 6141.28,7993.29 6116.28,7993.29 6123.78,8008.29 6133.78,8008.29
  region net SIGN1_RECV2: 6083.85,7917.64 6083.85,7892.64 6068.85,7900.14 6068.85,7910.14
  region net SIGN1_VCC2: 6405.11,7892.64 6405.11,7917.64 6420.11,7910.14 6420.11,7900.14
  region net VCC: 6372.68,7993.29 6347.68,7993.29 6355.18,8008.29 6365.18,8008.29
  region net VCC: 6315.35,8055.44 6315.35,8030.44 6300.35,8037.94 6300.35,8047.94
  region net VCC: 6347.68,8023.61 6372.68,8023.61 6365.18,8008.61 6355.18,8008.61
  region net SIGN1: 6173.61,6893.84 6173.61,6918.84 6188.61,6911.34 6188.61,6901.34
  region net SIGN1: 6116.28,6887.08 6141.28,6887.08 6133.78,6872.08 6123.78,6872.08
  region net SIGN1: 6141.28,6856.76 6116.28,6856.76 6123.78,6871.76 6133.78,6871.76
  region net SIGN1_RECV1: 6083.85,6781.04 6083.85,6756.04 6068.85,6763.54 6068.85,6773.54
  region net SIGN1_VCC1: 6405.11,6756.04 6405.11,6781.04 6420.11,6773.54 6420.11,6763.54
  region net VCC: 6372.68,6856.76 6347.68,6856.76 6355.18,6871.76 6365.18,6871.76
  region net VCC: 6315.35,6918.84 6315.35,6893.84 6300.35,6901.34 6300.35,6911.34
  region net VCC: 6347.68,6887.08 6372.68,6887.08 6365.18,6872.08 6355.18,6872.08
  region net VCC: 6182.12,4749.88 6207.12,4749.88 6199.67,4764.88 6189.67,4764.88
  region net SIGN3_VCC2: 9118.62,2659.37 9108.93,2644.2 9104,2652.1 9109.39,2660.52
  region net SIGN3_VCC3: 10091.81,2071.24 10081.66,2056.38 10076.98,2064.42 10082.62,2072.68
  region net SIGN3_RECV3: 10331.34,2488.86 10321.99,2473.47 10316.89,2481.25 10322.08,2489.8
  region net SIGN3_RECV2: 9328.56,3024.6 9319.77,3008.9 9314.39,3016.49 9319.28,3025.22
  region net SIGN3_VCC1: 8133.47,3226.68 8123.92,3211.42 8118.92,3219.27 8124.22,3227.75
  region net SIGN3_RECV1: 8347.98,3599.11 8338.5,3583.81 8333.46,3591.63 8338.73,3600.13
  region net SIGN3: 8042.46,3577.35 8033.49,3561.75 8042.76,3561.03 8047.75,3569.7
  region net VCC: 8007.86,3518.26 7998.85,3502.68 8008.12,3501.94 8013.13,3510.6
  region net SIGN2_VCC1: 4149.11,3585.67 4140.32,3601.37 4149.6,3601.99 4154.49,3593.27
  region net SIGN2_VCC2: 3170.83,3009.07 3161.8,3024.64 3171.07,3025.4 3176.09,3016.75
  region net SIGN2_RECV2: 3370.09,2661.58 3360.86,2677.03 3370.12,2677.91 3375.25,2669.32
  region net SIGN2_VCC3: 2187.04,2437.23 2177.72,2452.63 2186.98,2453.56 2192.16,2445
  region net SIGN2_RECV3: 2383.91,2096.75 2374.5,2112.1 2383.75,2113.08 2388.98,2104.55
  region net SIGN2_RECV1: 4354.28,3230.31 4345.28,3245.9 4354.56,3246.63 4359.56,3237.97
  region net SIGN2: 4553.89,3536.55 4544.94,3552.16 4539.64,3544.52 4544.61,3535.84
  region net VCC: 4517.3,3597.96 4508.31,3613.56 4503.03,3605.89 4508.02,3597.23
  region net SIGN1_RECV3: 6016.58,9141.53 6034.58,9141.53 6030.58,9133.14 6020.58,9133.14
  region net SIGN1_VCC3: 6453.98,9141.93 6471.98,9141.93 6467.98,9133.53 6457.98,9133.53
  region net SIGN1_RECV2: 6032.99,8005.3 6014.99,8005.33 6018.98,7996.93 6028.98,7996.91
  region net SIGN1_VCC2: 6473.96,8005.33 6455.96,8005.3 6459.98,7996.91 6469.98,7996.93
  region net SIGN1_RECV1: 6031.8,6868.68 6013.8,6868.73 6017.78,6860.32 6027.78,6860.29
  region net SIGN1_VCC1: 6470.39,6868.69 6452.39,6868.72 6456.38,6860.32 6466.38,6860.3
  region net VCC: 6286.17,6572.37 6268.17,6572.39 6272.18,6580.79 6282.18,6580.77
  region net SIGN1: 6224.35,6571.97 6206.35,6571.99 6210.36,6580.38 6220.36,6580.38
  region net VCC: 6307.86,4858.49 6300.48,4874.91 6294.46,4867.82 6298.56,4858.69
  region net VCC: 6323.4,4870.42 6310.37,4858 6319.06,4854.68 6326.3,4861.58
  region net VCC: 6475.95,4327.46 6475.88,4345.46 6467.49,4341.43 6467.53,4331.43
  region net VCC: 6492.86,4344.41 6474.86,4344.45 6478.88,4352.84 6488.88,4352.82
  region net VCC: 6159.12,4616.66 6196.7,4579.08 6163.9,4576.8 6156.83,4583.87